# Altium PCB Xenon.PcbDoc
Units mm, origin at the board's own origin, x right, y up, seen from the top; angles counter-clockwise.
Board outline 40 x 40 mm, 2 copper layers (Top Layer, Bottom Layer); 37 components, 52 nets, 189 pads, 93 vias.
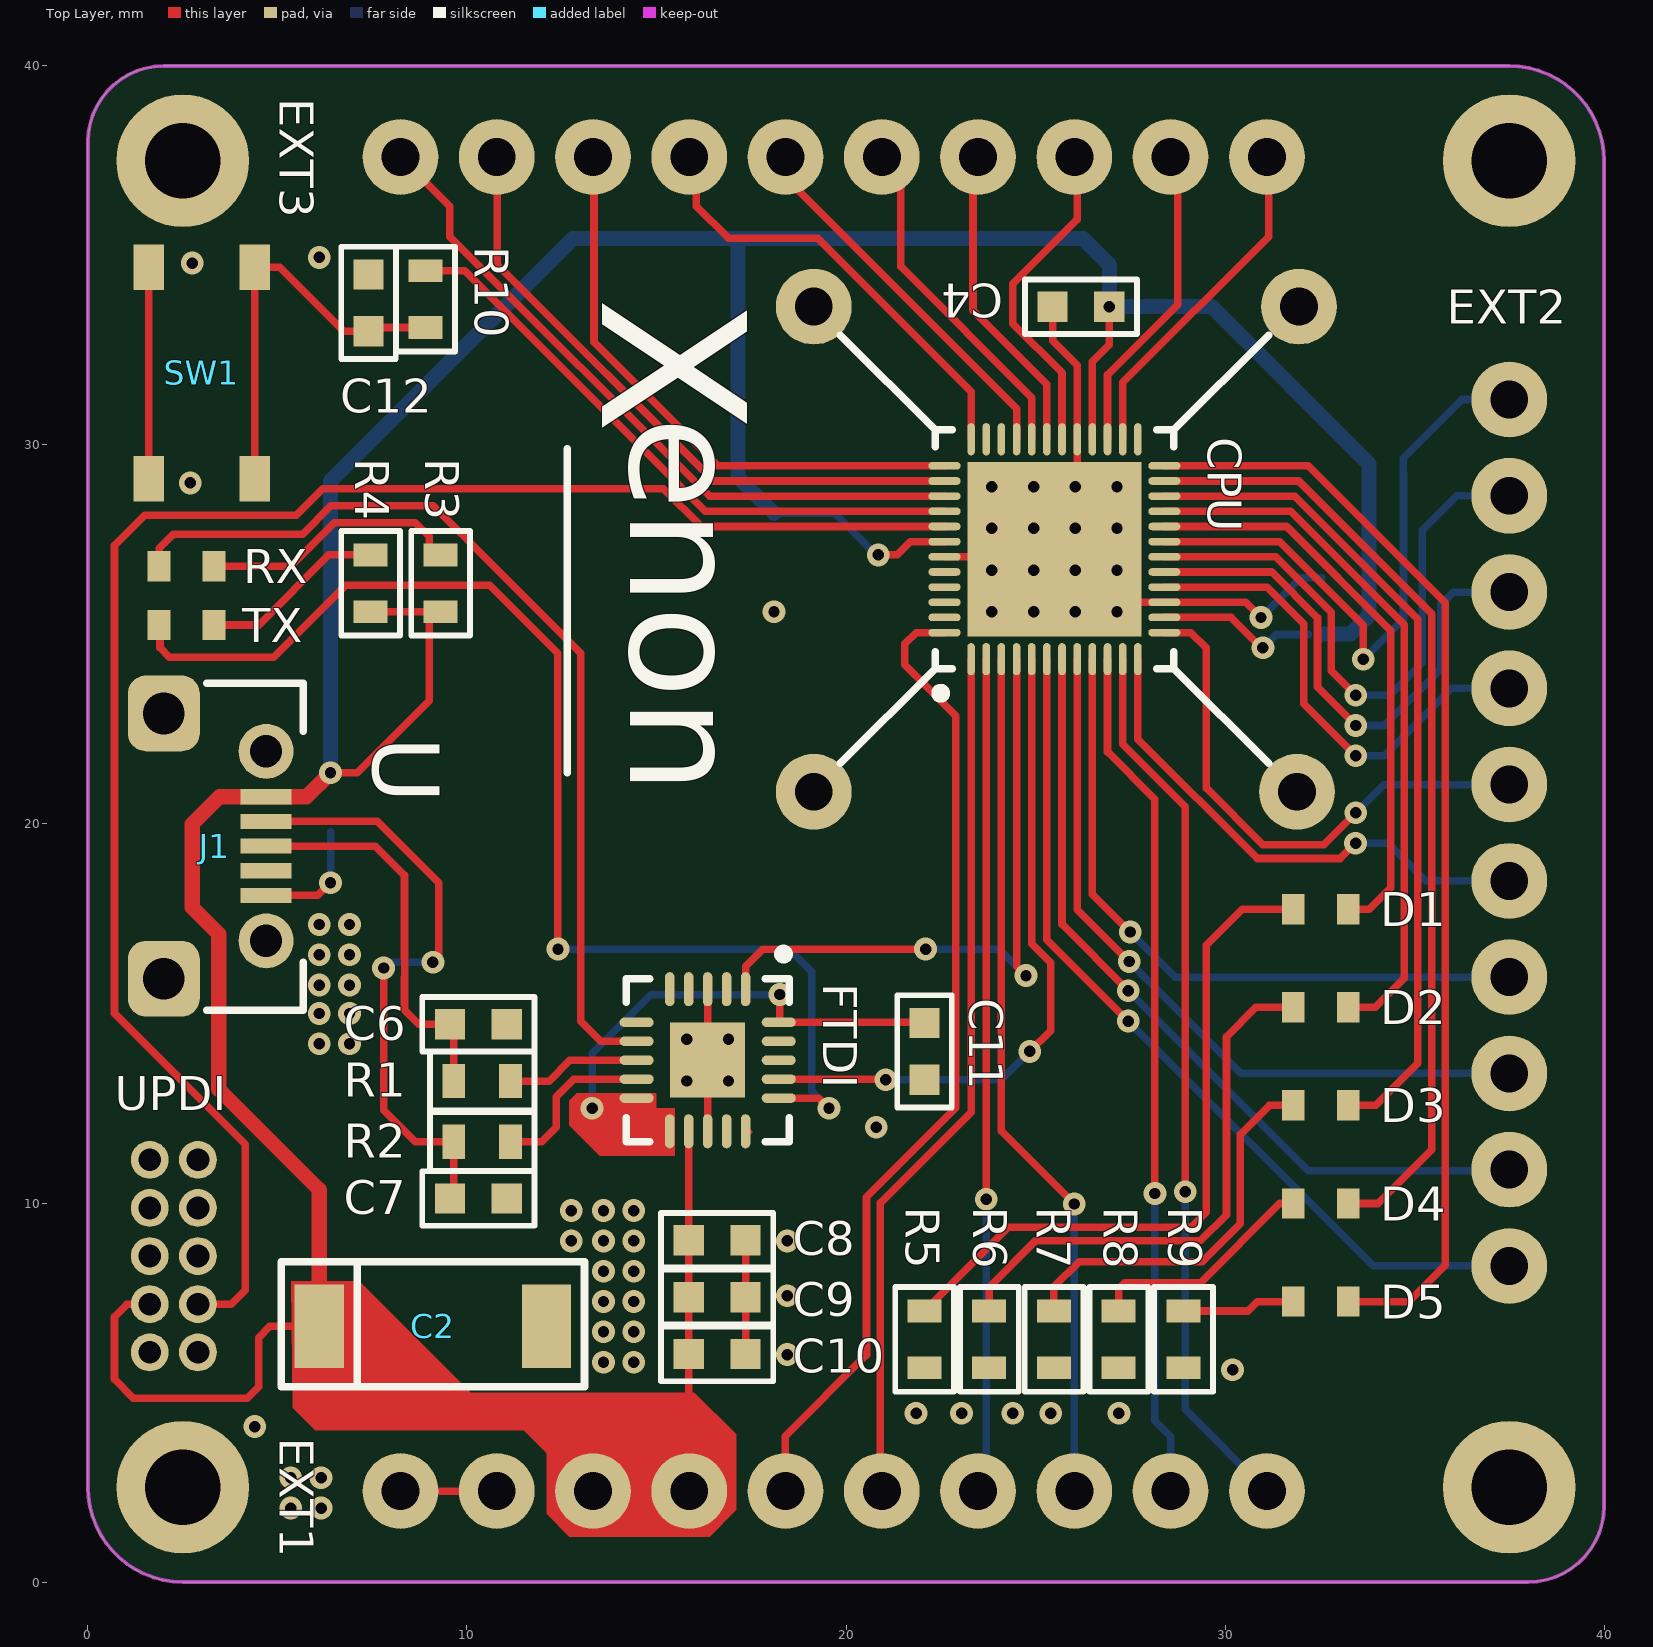
[diagram p0: Top Layer view]
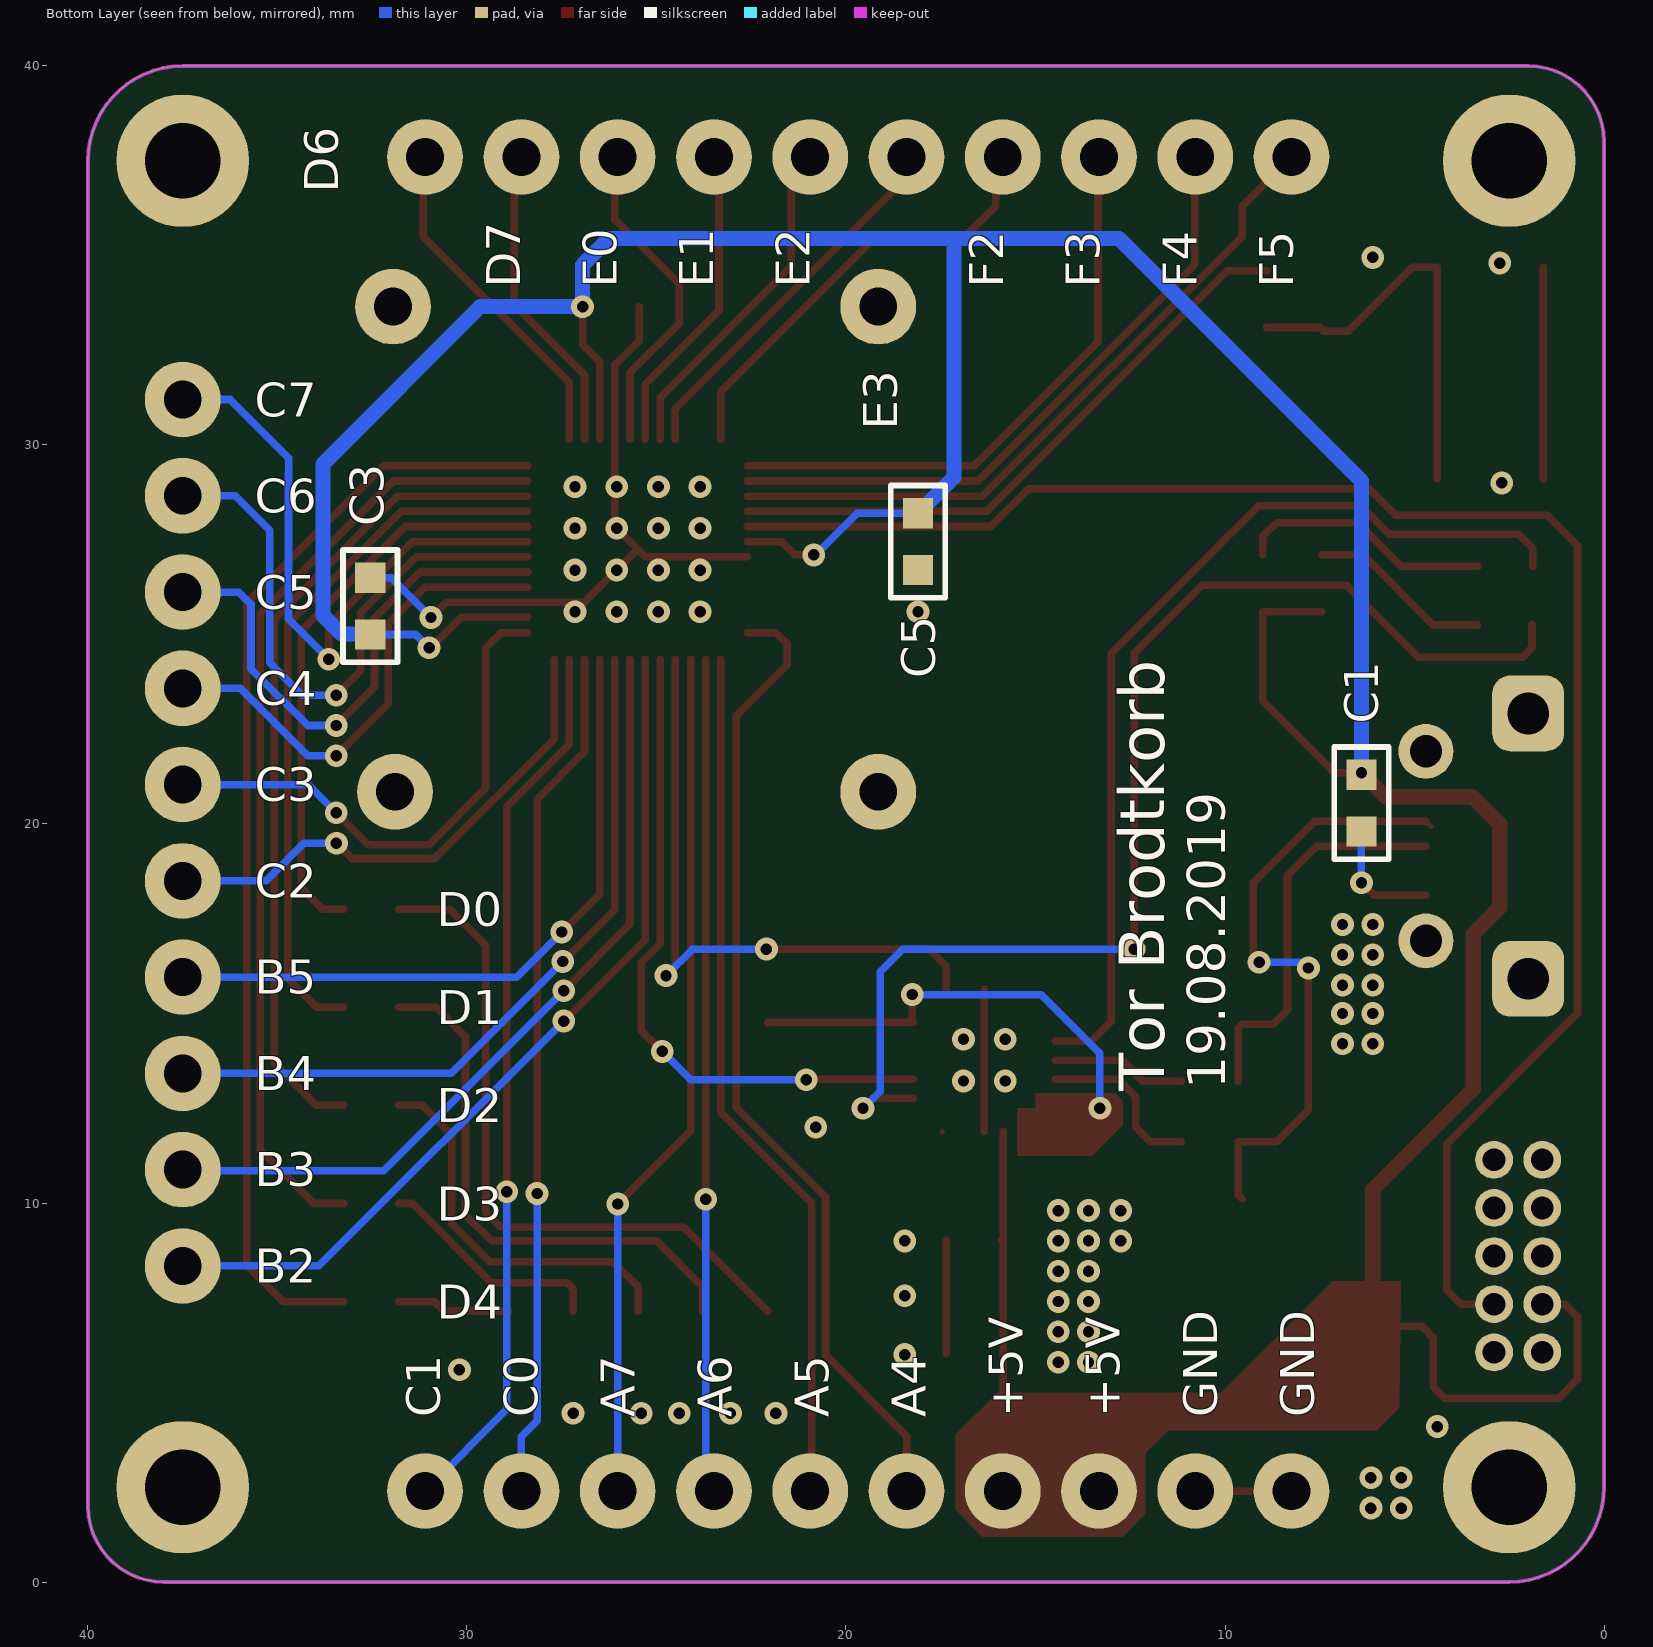
[diagram p1: Bottom Layer view, seen from below]
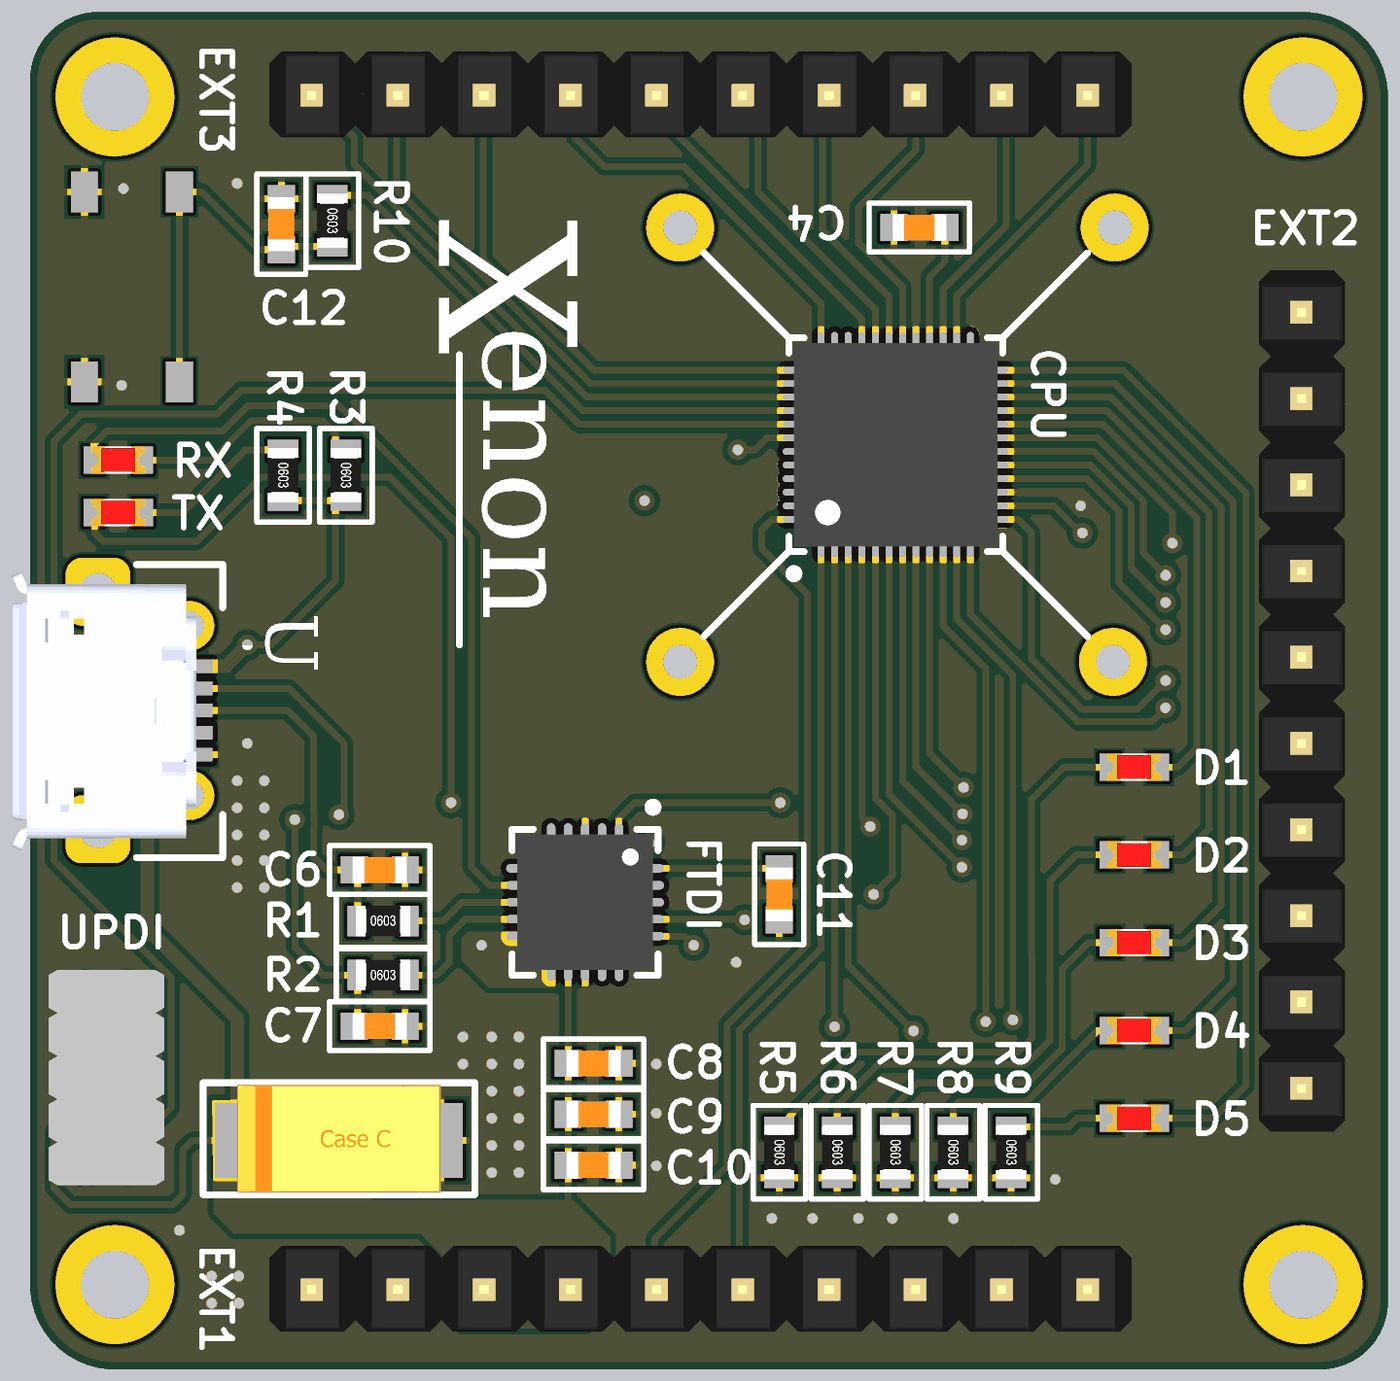
[diagram p2: 3D render of the assembled board from above, using the file's embedded part models]
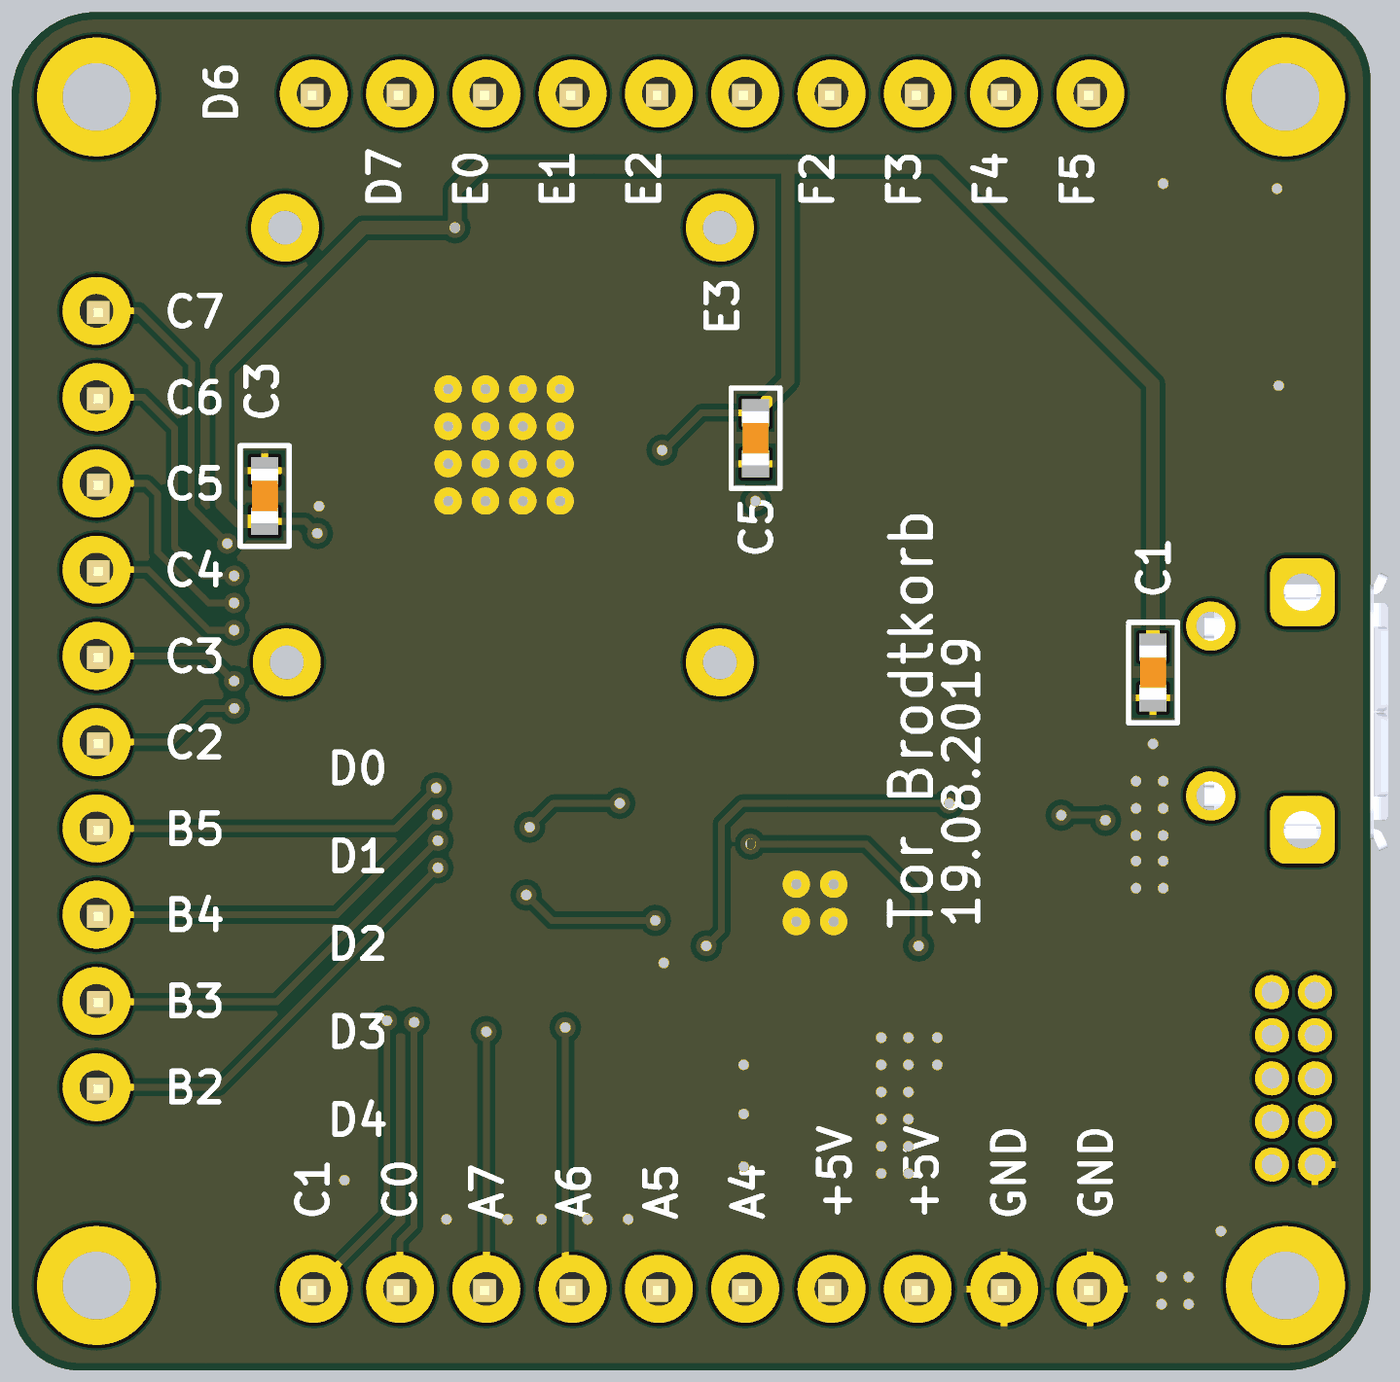
[diagram p3: 3D render of the assembled board from below, using the file's embedded part models]

## Layer stack, top to bottom
Top Solder: solder mask 0.0102, Solder Resist, Dk 3.5
Top Layer: signal copper 0.0356
Dielectric 1: dielectric 0.32, FR-4, Dk 4.8
Bottom Layer: signal copper 0.0356
Bottom Solder: solder mask 0.0102, Solder Resist, Dk 3.5

## Board outline
2.5,0 cw(c2.5,2.5) 0,2.5 0,38 cw(c2,38) 2,40 37.5,40 cw(c37.5,37.5) 40,37.5 40,2 cw(c38,2) 38,0

## Design rules (kind name [scope] priority, off if disabled: settings)
Clearance [All] p1: gap=0.16 ignorepadtopadclearanceinfootprint=FALSE except(0: Arc-Text Arc-Hole Track-Text Track-Hole SMDPad-Text SMDPad-Hole THPad-Text THPad-Hole Via-Text Via-Hole Fill-Text Fill-Hole Poly-Text Poly-Hole Region-Text Region-Hole Text-Text Text-Hole)
Height [All] p1: minheight=0 maxheight=200 prefheight=12.7
HoleSize [All] p1: absolutevalues=TRUE maxlimit=6.35 minlimit=0.3 maxpercent=80.000 minpercent=20.000
MinimumSolderMaskSliver [All] p1: minsoldermaskwidth=0.1
PlaneClearance [All] p1: clearance=1
PlaneConnect [All] p1: planeconnectstyle=Relief reliefexpansion=0.508 reliefentries=4 reliefconductorwidth=1 reliefairgap=0.254
PolygonConnect PolygonConnect_1 [IsVia] p1: connectstyle=Direct reliefconductorwidth=0.254 reliefentries=4 polygonreliefangle="90 Angle" airgapwidth=0.254
PolygonConnect [All] p2: connectstyle=Relief reliefconductorwidth=0.2 reliefentries=4 polygonreliefangle="90 Angle" airgapwidth=0.2
RoutingVias [All] p1: holewidth=0.3 width=0.6 viastyle="Through Hole" minholewidth=0.3 minwidth=0.6 maxholewidth=6.35 maxwidth=10
SilkToSolderMaskClearance [IsPad] p1: minsilkscreentomaskgap=0.178 clearancetoexposedcopper=TRUE
SolderMaskExpansion [All] p1: expansion=0.102
Width "Width power" [InNet('+5V')] p1: maxlimit=0.5 minlimit=0.127 preferedwidth=0.4 minimp=50.000000 maximp=50.000000 favimp=50.000000
Width [All] p2: maxlimit=0.5 minlimit=0.127 preferedwidth=0.2 minimp=50.000000 maximp=50.000000 favimp=50.000000
24 further rules are at their usual default settings.

## Classes and differential pairs
component class Xenon: C2 C4 C5 C6 C7 C8 C9 C10 C11 C12 CPU D1 D2 D3 D4 D5 EXT1 EXT2 EXT3 FTDI J1 R1 R2 R3 R4 R5 R6 R7 R8 R9 R10 RX SW1 TX UPDI

## Components (designator, comment, footprint, x,y, rotation, side; value= is the part's Value field where it differs from the comment)
C1 "02016D104KAT2A" C0603 6.4,20.55 r90 bottom value=4.7uF
C2 "293D106X9020C2TE3" 293D106X9020C2TE3 6.1,6.75 r0 top value=10uF
C3 "02016D104KAT2A" C0603 32.55,25.75 r270 bottom value=100nF
C4 "02016D104KAT2A" C0603 26.2,33.65 r0 top value=100nF
C5 "02016D104KAT2A" C0603 18.1,27.45 r90 bottom value=100nF
C6 "02016D104KAT2A" C0603 10.3,14.717 r180 top value=47pF
C7 "02016D104KAT2A" C0603 10.3,10.117 r180 top value=47pF
C8 "02016D104KAT2A" C0603 16.6,9.017 r180 top value=10nF
C9 "02016D104KAT2A" C0603 16.6,7.517 r180 top value=100nF
C10 "02016D104KAT2A" C0603 16.6,6.017 r180 top value=4.7pF
C11 "02016D104KAT2A" C0603 22.07,14 r90 top value=100nF
C12 "02016D104KAT2A" C0603 7.4,33.75 r270 top value=100nF
CPU "ATmega4809" ATMEGA4809-MFR 25.5,27.25 r90 top (schematic designator U2)
D1 "LED Red" "L0603 RED" 32.525,17.75 r180 top
D2 "LED Red" "L0603 RED" 32.525,15.163 r180 top
D3 "LED Red" "L0603 RED" 32.525,12.575 r180 top
D4 "LED Red" "L0603 RED" 32.525,9.988 r180 top
D5 "LED Red" "L0603 RED" 32.525,7.4 r180 top
EXT1 "Header" "Header 1x10 2.54mm" 8.245,2.4 r270 top
EXT2 "Header" "Header 1x10 2.54mm" 37.5,31.2 r180 top (schematic designator J1)
EXT3 "Header" "Header 1x10 2.54mm" 8.245,37.6 r270 top
FTDI "FTDI" FT231XQ-R 16.35,13.767 r270 top (schematic designator U1)
J1 "USB micro" "USB micro" 2.5,19.4 r270 top
R1 "CPF-A-0603B100KE1" R0603 10.4,13.217 r0 top value=27R
R2 "CPF-A-0603B100KE1" R0603 10.4,11.617 r0 top value=27R
R3 "CPF-A-0603B100KE1" R0603 9.3,26.35 r270 top value=270R
R4 "CPF-A-0603B100KE1" R0603 7.45,26.35 r270 top value=270R
R5 "CPF-A-0603B100KE1" R0603 22.07,6.4 r270 top value=330R
R6 "CPF-A-0603B100KE1" R0603 23.778,6.4 r270 top value=330R
R7 "CPF-A-0603B100KE1" R0603 25.485,6.4 r270 top value=330R
R8 "CPF-A-0603B100KE1" R0603 27.193,6.4 r270 top value=330R
R9 "CPF-A-0603B100KE1" R0603 28.9,6.4 r270 top value=330R
R10 "CPF-A-0603B100KE1" R0603 8.9,33.85 r270 top value=100R
RX "LED Red" "L0603 RED" 2.6,26.8 r180 top (schematic designator RX1)
SW1 "KSC222G LFS" "KSC222G LFS" 3,31.9 r180 top
TX "LED Red" "L0603 RED" 2.6,25.25 r180 top (schematic designator TX1)
UPDI "Header 2x3" "HEADER 2X5 1.27MM" 2.9,11.14 r180 top (schematic designator J2)

## Footprints (in the part's own frame and the unit in brackets; to place one, negate y for a bottom-side part, rotate by r counter-clockwise, add the part's x,y. Pads: shape width x height; smd on the part's side, far side on the other; paste and mask are expansions set on the pad)
293D106X9020C2TE3 [mm] "Tant. CapasitorSMD 10uF"
  rect 1.3x2.2 smd paste+0: 1(0,0) 2(6,0)
  silkscreen extent -1,-1.6 7,1.7, body extent 0,-1.55 6,1.65, height 2.5
ATMEGA4809-MFR [mm] "QFN, 48-Leads, Body 6.00x6.00mm, Pitch 0.40mm, Thermal Pad 4.60x4.60mm, IPC Medium Density"
  oval 0.85x0.2 smd mask+0.172: 1(-2.9,2.2) 2(-2.9,1.8) 3(-2.9,1.4) 4(-2.9,1) 5(-2.9,0.6) 6(-2.9,0.2) 7(-2.9,-0.2) 8(-2.9,-0.6) 9(-2.9,-1) 10(-2.9,-1.4) 11(-2.9,-1.8) 12(-2.9,-2.2) 25(2.9,-2.2) 26(2.9,-1.8) 27(2.9,-1.4) 28(2.9,-1) 29(2.9,-0.6) 30(2.9,-0.2) 31(2.9,0.2) 32(2.9,0.6) 33(2.9,1) 34(2.9,1.4) 35(2.9,1.8) 36(2.9,2.2)
  oval 0.2x0.85 smd mask+0.172: 13(-2.2,-2.9) 14(-1.8,-2.9) 15(-1.4,-2.9) 16(-1,-2.9) 17(-0.6,-2.9) 18(-0.2,-2.9) 19(0.2,-2.9) 20(0.6,-2.9) 21(1,-2.9) 22(1.4,-2.9) 23(1.8,-2.9) 24(2.2,-2.9) 37(2.2,2.9) 38(1.8,2.9) 39(1.4,2.9) 40(1,2.9) 41(0.6,2.9) 42(0.2,2.9) 43(-0.2,2.9) 44(-0.6,2.9) 45(-1,2.9) 46(-1.4,2.9) 47(-1.8,2.9) 48(-2.2,2.9)
  rect 4.6x4.6 smd: 49(0,0)
  silkscreen extent -3.92,-3.15 3.15,3.15, body extent -3,-3 3,3, height 0.55
C0603 [mm]
  rect 0.8x0.8 smd: 1(-0.75,0) 2(0.75,0)
  silkscreen extent -1.48,-0.72 1.48,0.72, body extent -0.8,-0.4 0.8,0.4, height 0.8
FT231XQ-R [mm] "QFN, 20-Leads, Body 4.00x4.00mm, Pitch 0.50mm, Thermal Pad 1.98x1.98mm, IPC Medium Density"
  oval 0.9x0.25 smd mask+0.162: 1(-1.875,1) 2(-1.875,0.5) 3(-1.875,0) 4(-1.875,-0.5) 5(-1.875,-1) 11(1.875,-1) 12(1.875,-0.5) 13(1.875,0) 14(1.875,0.5) 15(1.875,1)
  oval 0.25x0.9 smd mask+0.162: 6(-1,-1.875) 7(-0.5,-1.875) 8(0,-1.875) 9(0.5,-1.875) 10(1,-1.875) 16(1,1.875) 17(0.5,1.875) 18(0,1.875) 19(-0.5,1.875) 20(-1,1.875)
  rect 1.98x1.98 smd: 21(0,0)
  silkscreen extent -2.92,-2.15 2.15,2.15, body extent -2,-2 2,2, height 0.8
"Header 1x10 2.54mm" [mm]
  round 2 hole 1: 1(0,0) 2(0,2.54) 3(0,5.08) 4(0,7.62) 5(0,10.16) 6(0,12.7) 7(0,15.24) 8(0,17.78) 9(0,20.32) 10(0,22.86)
  body extent -1.24,-1.2 1.3,24.2, height 9.2
"HEADER 2X5 1.27MM" [mm]
  round 1 hole 0.6: 1(0,0) 2(1.27,0) 3(0,1.27) 4(1.27,1.27) 5(0,2.54) 6(1.27,2.54) 7(0,3.81) 8(1.27,3.81) 9(0,5.08) 10(1.27,5.08)
  body extent -1.05,-0.64 2.35,5.72, height 5.5
"KSC222G LFS" [mm]
  rect 0.8x1.2 smd: 1(-1.4,2.794) 2(-1.4,-2.794) 3(1.4,2.794) 4(1.4,-2.794)
  body extent -2.29,-3.06 2.29,3.05, height 1.5
"L0603 RED" [mm]
  rect 0.6x0.8 smd: 1(-0.725,0) 2(0.725,0)
  body extent -0.8,-0.4 0.8,0.4, height 0.6
R0603 [mm]
  rect 0.6x0.9 smd: 1(-0.75,0) 2(0.75,0)
  silkscreen extent -1.38,-0.77 1.38,0.78, body extent -0.8,-0.45 0.8,0.45, height 0.5
"USB micro" [mm]
  rrect50% 2x1.9 hole 1.1 unplated: 0(-3.517,-0.5) 0(3.483,-0.5)
  round 1.45 hole 0.85 unplated: 0(-2.517,2.2) 0(2.483,2.2)
  rect 0.4x1.35 smd mask+0.152: 1(-1.317,2.2) 2(-0.667,2.2) 3(-0.017,2.2) 4(0.633,2.2) 5(1.283,2.2)
  silkscreen extent -4.32,0.63 4.32,3.18, body extent -4.1,-3.03 4.1,2.4, height 0.23

## Part data
C1 C3 C4 C5 C6 C7 C8 C9 C10 C11 C12: "C0603"
C2: "Tant. CapasitorSMD 10uF"
CPU: library part ATMEGA4809-MFR, "ATmega4809 48-pin UQFN"
D1 D2 D3 D4 D5 RX TX: library part HSMG-C190, "LED 0603 Red", Color=Red
EXT1 EXT2 EXT3: library part 2210S-10SG-85, "Header 1x10 2.54mm male"
FTDI: library part FT231XQ-R, "UART to USB converter"
J1: library part 47590-0001
R1 R2 R3 R4 R5 R6 R7 R8 R9 R10: "R0603"
SW1: "Button SMD"
UPDI: library part 20021111-00010T4LF, "Header  2x5 1.27mm male"

## Free pads (board coordinates)
  round 3.5 hole 2: ""(2.5,2.5) ""(2.5,37.5) ""(37.5,2.5) ""(37.5,37.5)
  round 2 hole 1: ""(19.15,20.85) ""(19.15,33.65) ""(31.9,20.85) ""(31.95,33.65)

## Via types
v1: diameter 0.6, hole 0.3, Top Layer to Bottom Layer, tented both sides, 73 vias
v2: diameter 0.6, hole 0.3, Top Layer to Bottom Layer, 20 vias

## Nets (pads, with @x,y where several pads share a name; then routed paths per layer and width w, separated by ;. In a path a pad name is that pad's centre, name@x,y a point inside that pad or via, vN(x,y) a via of type N, cw(c..) or ccw(c..) an arc to the next point about the centre after c; other vN are vias at no path point)
+5V: C1.2 C2.1 C3.2 C4.2 C5.2 C8.2 C9.2 C10.2 CPU.14 CPU.28 CPU.42 EXT1.3 EXT1.4 FTDI.12 J1.1 R3.2 R4.2 UPDI.8 | length 126.3
  Top Layer w0.2: UPDI.8 1.03,7.33 0.7,7 0.7,5.35 1.2,4.85 4.2,4.85 4.5,5.15 4.5,6.45 4.8,6.75 C2.1 6.1,4.75 6.55,4.3 12.95,4.3 13.325,3.925 EXT1.3 EXT1.4 15.85,2.415 C10.2 C9.2 C8.2 ; v1(6.4,21.35) 7.1,21.35 9,23.25 9,25.6 R4.2 ; FTDI.12 15.85,9.067 C8.2@15.9,9.017 ; v1(20.85,27.1) 21.35,27.1 21.7,27.45 CPU.42 ; CPU.28 26.5,32.2 26.95,32.65 v1(26.95,33.65) ; CPU.14 30.158,25.45 30.958,24.65 v1(31,24.65)
  Top Layer w0.4: C2.1 6.1,10.35 3.45,13 3.45,17.1 2.75,17.8 2.75,20 3.467,20.717 J1.1 5.767,20.717 v1(6.4,21.35)
  Bottom Layer w0.2: C5.2 19.7,28.2 20.8,27.1 v1(20.85,27.1) ; v1(31,24.65) 31.35,25 C3.2@32.2,25
  Bottom Layer w0.4: C1.2@6.45,21.3 v1(6.4,21.35) 6.4,29.05 12.8,35.45 17.15,35.45 ; C5.2 17.15,29.15 17.15,35.45 ; C3.2 32.56,25.01 33.31,25.01 33.8,25.5 33.8,29.5 29.65,33.65 v1(26.95,33.65) 26.95,34.75 26.25,35.45 17.15,35.45
A1: CPU.39 EXT3.1 | length 18.5
  Top Layer w0.2: EXT3.1 9.55,36.295 9.55,35.5 16.4,28.65 CPU.39
A2: CPU.38 EXT3.2 | length 17.2
  Top Layer w0.2: EXT3.2@11.28,37.6 10.8,37.12 10.8,34.759 16.509,29.05 CPU.38
A3: CPU.37 EXT3.3 | length 15.7
  Top Layer w0.2: EXT3.3@13.82,37.6 13.35,37.13 13.35,32.718 16.618,29.45 CPU.37
A4: CPU.36 EXT3.4 | length 11.9
  Top Layer w0.2: EXT3.4 16.05,37.415 16.05,36.3 16.9,35.45 19.25,35.45 23.3,31.4 CPU.36
A5: CPU.33 EXT3.5 | length 10
  Top Layer w0.2: EXT3.5 18.405,37.045 24.5,30.95 CPU.33
A6: CPU.32 EXT3.6 | length 8.9
  Top Layer w0.2: EXT3.6@21.44,37.6 21.44,34.71 24.9,31.25 CPU.32
A7: CPU.31 EXT3.7 | length 8.5
  Top Layer w0.2: EXT3.7@23.98,37.6 23.35,36.97 23.35,33.55 25.3,31.6 CPU.31
A8: CPU.30 EXT3.8 | length 8.9
  Top Layer w0.2: CPU.30 25.7,31.9 24.4,33.2 24.4,34.25 26.1,35.95 26.1,37.18 EXT3.8@26.52,37.6
A9: CPU.27 EXT3.9 | length 8.3
  Top Layer w0.2: CPU.27 26.9,31.85 28.75,33.7 28.75,37.29 EXT3.9@29.06,37.6
A10: CPU.26 EXT3.10 | length 9.2
  Top Layer w0.2: CPU.26 27.3,31.65 31.15,35.5 31.15,37.15 EXT3.10@31.6,37.6
CS: CPU.3 EXT1.8 | length 22.7
  Top Layer w0.2: CPU.3 24.1,11.9 v1(26.025,9.975)
  Bottom Layer w0.2: EXT1.8 v1(26.025,9.975)
D1: CPU.19 EXT2.1 | length 16.2
  Top Layer w0.2: CPU.19 31.445,27.45 33.45,25.445 33.65,25.245 v1(33.65,24.35)
  Bottom Layer w0.2: v1(33.65,24.35) 34.71,25.41 34.71,29.241 34.7,29.251 34.7,29.65 36.25,31.2 EXT2.1
D2: CPU.18 EXT2.2 | length 15.7
  Top Layer w0.2: CPU.18 31.336,27.05 32.8,25.586 32.8,24.05 v1(33.45,23.4)
  Bottom Layer w0.2: v1(33.45,23.4) 34.35,23.4 35.2,24.25 35.2,27.75 36.11,28.66 EXT2.2
D3: CPU.17 EXT2.3 | length 14.3
  Top Layer w0.2: CPU.17 31.227,26.65 32.44,25.437 32.44,23.618 33.45,22.608 v1(33.45,22.6)
  Bottom Layer w0.2: v1(33.45,22.6) 34.2,22.6 35.7,24.1 35.7,25.8 36.02,26.12 EXT2.3
D4: CPU.16 EXT2.4 | length 12.9
  Top Layer w0.2: CPU.16 31.118,26.25 32.08,25.288 32.08,23.17 v1(33.45,21.8)
  Bottom Layer w0.2: v1(33.45,21.8) 34.2,21.8 35.98,23.58 EXT2.4
D5: CPU.13 EXT2.5 | length 14.2
  Top Layer w0.2: CPU.13 29.1,25.05 29.5,24.65 29.5,20.95 31,19.45 32.6,19.45 v1(33.45,20.3)
  Bottom Layer w0.2: v1(33.45,20.3) 34.19,21.04 EXT2.5
D6: CPU.12 EXT2.6 | length 13.8
  Top Layer w0.2: CPU.12 27.7,22.241 30.851,19.09 33.04,19.09 v1(33.445,19.495)
  Bottom Layer w0.2: v1(33.445,19.495) 34.305,19.495 35.3,18.5 EXT2.6
D7: CPU.9 EXT2.7 | length 18.1
  Top Layer w0.2: CPU.9 26.5,18.15 v1(27.5,17.15)
  Bottom Layer w0.2: v1(27.5,17.15) 28.69,15.96 EXT2.7
D8: CPU.8 EXT2.8 | length 19.8
  Top Layer w0.2: CPU.8 26.1,17.742 v1(27.471,16.371)
  Bottom Layer w0.2: v1(27.471,16.371) 30.422,13.42 EXT2.8
D9: CPU.7 EXT2.9 | length 21.5
  Top Layer w0.2: CPU.7 25.7,17.35 v1(27.45,15.6)
  Bottom Layer w0.2: v1(27.45,15.6) 32.2,10.85 37.47,10.85 EXT2.9
D10: CPU.6 EXT2.10 | length 23.2
  Top Layer w0.2: CPU.6 25.3,16.95 v1(27.45,14.8)
  Bottom Layer w0.2: v1(27.45,14.8) 33.91,8.34 EXT2.10
EXT_RXD: CPU.11 EXT1.10 | length 23.5
  Top Layer w0.2: CPU.11 27.3,22.1 28.95,20.45 v1(28.95,10.3)
  Bottom Layer w0.2: v1(28.95,10.3) 28.95,4.555 EXT1.10
EXT_TXD: CPU.10 EXT1.9 | length 22.6
  Top Layer w0.2: CPU.10 26.9,21.9 28.15,20.65 v1(28.15,10.25)
  Bottom Layer w0.2: v1(28.15,10.25) 28.15,4.25 28.565,3.835 EXT1.9
GND: C1.1 C2.2 C3.1 C4.1 C5.1 C6.1 C7.1 C8.1 C9.1 C10.1 C11.1 C12.1 CPU.15 CPU.29 CPU.43 CPU.49 EXT1.1 EXT1.2 FTDI.3 FTDI.13 FTDI.21 J1.5 R5.2 R6.2 R7.2 R8.2 R9.2 SW1.3 SW1.4 UPDI.10 | length 36.2
  Top Layer w0.2: SW1.3 SW1.4 ; J1.5 6.067,18.117 v1(6.4,18.45) ; EXT1.1 EXT1.2 ; FTDI.13 FTDI.21 FTDI.3 ; C10.1 C9.1 C8.1 ; CPU.43 25.3,27.05 CPU.49 ; C4.1 25.45,32.75 26.1,32.1 CPU.29 26.1,27.85 v2(26.05,27.8) CPU.49 ; v1(30.95,25.45) 30.55,25.85 CPU.15 26.9,25.85 CPU.49
  Bottom Layer w0.2: v1(6.4,18.45) C1.1 ; v1(30.95,25.45) 32,26.5 C3.1
  other v1: 5.35,1.95 6.15,1.95 5.35,2.75 6.15,2.75 4.4,4.1 21.85,4.45 23.05,4.45 24.4,4.45 25.4,4.45 27.2,4.45 30.2,5.6 13.6,5.8 14.4,5.8 18.45,6 13.6,6.6 14.4,6.6 13.6,7.4 14.4,7.4 18.45,7.55 13.6,8.2 14.4,8.2 12.75,9 13.6,9 14.4,9 18.45,9 12.75,9.8 13.6,9.8 14.4,9.8 20.8,12 6.1,14.2 6.9,14.2 6.1,15 6.9,15 6.1,15.75 6.9,15.75 6.1,16.55 6.9,16.55 6.1,17.35 6.9,17.35 2.7,29 2.75,34.8 6.1,34.95
  other v2: 15.8,13.217 16.9,13.217 15.8,14.317 16.9,14.317 23.85,25.6 24.95,25.6 26.05,25.6 27.15,25.6 23.85,26.7 24.95,26.7 26.05,26.7 27.15,26.7 23.85,27.8 24.95,27.8 27.15,27.8 23.85,28.9 24.95,28.9 26.05,28.9 27.15,28.9
LED_1: CPU.20 D1.1 | length 15.2
  Top Layer w0.2: CPU.20 31.623,27.85 34.37,25.103 34.37,18.32 33.8,17.75 D1.1
LED_2: CPU.21 D2.1 | length 18.7
  Top Layer w0.2: CPU.21 31.732,28.25 34.73,25.252 34.73,15.93 33.963,15.163 D2.1
LED_3: CPU.22 D3.1 | length 22
  Top Layer w0.2: CPU.22 31.841,28.65 35.09,25.401 35.09,13.69 33.975,12.575 D3.1
LED_4: CPU.23 D4.1 | length 25.4
  Top Layer w0.2: CPU.23 31.95,29.05 35.45,25.55 35.45,11.4 34.038,9.988 D4.1
LED_5: CPU.24 D5.1 | length 29.3
  Top Layer w0.2: CPU.24 32.2,29.45 35.81,25.84 35.81,8.36 34.85,7.4 D5.1
MISO: CPU.1 EXT1.6 | length 23
  Top Layer w0.2: EXT1.6 20.9,2.445 20.9,10 23.3,12.4 CPU.1
  Bottom Layer w0.2: EXT1.6@20.9,2.445 EXT1.6
MOSI: CPU.48 EXT1.5 | length 25.9
  Top Layer w0.2: EXT1.5 18.4,2.405 18.4,3.85 20.54,5.99 20.54,10.149 22.9,12.509 22.9,22.85 21.55,24.2 21.55,24.75 21.85,25.05 CPU.48
NetC6_2: C6.2 J1.3 R1.1 | length 10.4
  Top Layer w0.2: J1.3 7.583,19.417 8.35,18.65 8.35,16.442 8.36,16.432 8.36,15.968 8.35,15.958 8.35,15.1 8.733,14.717 C6.2 9.65,14.617 R1.1
NetC7_2: C7.2 J1.2 R2.1 | length 16.4
  Top Layer w0.127: J1.2@4.564,19.931 J1.2
  Top Layer w0.2: J1.2 7.633,20.067 9.25,18.45 9.25,16.5 v1(9.1,16.35) ; v1(7.8,16.2) 7.8,12.45 8.633,11.617 R2.1 9.65,10.217 C7.2
  Bottom Layer w0.2: v1(7.8,16.2) 7.95,16.35 v1(9.1,16.35)
NetC11_2: C11.2 FTDI.10 FTDI.11 FTDI.20 | length 13.5
  Top Layer w0.2: 13.3,11.9 v1(13.3,12.5) 13.567,12.767 FTDI.10 ; FTDI.11@15.34,11.883 FTDI.11 ; v1(18.25,15.5) 18.25,14.792 FTDI.20 22.053,14.767 C11.2
  Bottom Layer w0.2: v1(13.3,12.5) 13.3,13.95 14.85,15.5 v1(18.25,15.5)
NetC12_2: C12.2 R10.2 SW1.1 SW1.2 | length 10.8
  Top Layer w0.2: SW1.1 SW1.2 5.056,34.694 6.75,33 C12.2 7.5,33.1 R10.2
NetD1_2: D1.2 R5.1 | length 18.3
  Top Layer w0.2: R5.1 24.28,9.36 29.11,9.36 29.51,9.76 29.51,12.19 29.5,12.2 29.5,16.8 30.45,17.75 D1.2
NetD2_2: D2.2 R6.1 | length 14.5
  Top Layer w0.2: R6.1 23.778,7.778 25,9 29.35,9 30.04,9.69 30.04,14.39 30.813,15.163 D2.2
NetD3_2: D3.2 R7.1 | length 10.3
  Top Layer w0.2: R7.1 25.485,7.785 26.15,8.45 29.4,8.45 30.4,9.45 30.4,11.8 31.175,12.575 D3.2
NetD4_2: D4.2 R8.1 | length 6.1
  Top Layer w0.2: R8.1 27.193,7.742 27.35,7.9 29.359,7.9 31.447,9.988 D4.2
NetD5_2: D5.2 R9.1 | length 3
  Top Layer w0.2: R9.1 30.6,7.15 30.85,7.4 D5.2
NetR1_2: FTDI.8 R1.2 | length 3.6
  Top Layer w0.2: R1.2 12.167,13.217 12.717,13.767 FTDI.8
NetR2_2: FTDI.9 R2.2 | length 4.5
  Top Layer w0.2: R2.2 11.967,11.617 12.35,12 12.35,12.8 12.817,13.267 FTDI.9
NetR3_1: R3.1 RX.1 | length 6.8
  Top Layer w0.2: RX.1 5.35,26.8 6.5,27.95 8.64,27.95 9,27.59 R3.1@9,27.1
NetR4_1: R4.1 TX.1 | length 4.9
  Top Layer w0.2: TX.1@3.35,25.25 4.5,25.25 6.35,27.1 R4.1
NetR10_1: CPU.40 R10.1 | length 16.3
  Top Layer w0.2: R10.1 9.941,34.6 16.291,28.25 CPU.40
NetRX1_2: FTDI.7 RX.2 | length 25.1
  Top Layer w0.2: RX.2 1.875,27.275 2.25,27.65 5.66,27.65 6.41,28.4 9.11,28.4 9.85,27.66 9.858,27.66 10.01,27.508 10.01,27.5 13,24.51 13,14.8 13.533,14.267 FTDI.7
NetTX1_2: FTDI.16 TX.2 | length 32.7
  Top Layer w0.2: TX.2@1.9,25.25 1.9,24.65 2.15,24.4 4.9,24.4 6.8,26.3 10.6,26.3 12.4,24.5 v1(12.4,16.7) ; FTDI.16 19.283,12.767 v1(19.55,12.5)
  Bottom Layer w0.2: v1(12.4,16.7) 18.5,16.7 19.1,16.1 19.1,12.95 v1(19.55,12.5)
SCK: CPU.2 EXT1.7 | length 22
  Top Layer w0.2: v1(23.7,10.1) CPU.2
  Bottom Layer w0.2: EXT1.7 23.7,2.615 v1(23.7,10.1)
UPDI: CPU.41 UPDI.7 | length 45.4
  Top Layer w0.2: UPDI.7 3.78,7.33 4.15,7.7 4.15,11.55 0.7,15 0.7,27.35 1.5,28.15 5.5,28.15 6.2,28.85 15.182,28.85 16.182,27.85 CPU.41
USB_RXD: CPU.5 FTDI.17 | length 17.7
  Top Layer w0.2: FTDI.17 21.033,13.267 v1(21.05,13.25) ; v1(24.85,14) 25.4,14.55 25.4,16.341 24.9,16.841 CPU.5
  Bottom Layer w0.2: v1(21.05,13.25) 24.1,13.25 v1(24.85,14)
USB_TXD: CPU.4 FTDI.1 | length 16.9
  Top Layer w0.2: FTDI.1 17.35,16.25 17.8,16.7 v1(22.1,16.7) ; CPU.4 24.5,16.25 v1(24.75,16)
  Bottom Layer w0.2: v1(22.1,16.7) 24.05,16.7 v1(24.75,16)
pads on no net: CPU.25 CPU.34 CPU.35 CPU.44 CPU.45 CPU.46 CPU.47 FTDI.2 FTDI.4 FTDI.5 FTDI.6 FTDI.14 FTDI.15 FTDI.18 FTDI.19 J1.0 J1.4 UPDI.1 UPDI.2 UPDI.3 UPDI.4 UPDI.5 UPDI.6 UPDI.9
copper on no net: | length 0
  Top Layer w0.127: 17.45,11.892 17.465,11.877
  other v1: 18.1,25.6

## Polygon pours and split planes (outlines as drawn)
GND on Bottom Layer "BOTTOM GND" (solid, shelved, pour order 3): 2.5,0 cw(c2.5,2.5) 0,2.5 0,38 cw(c2,38) 2,40 37.5,40 cw(c37.5,37.5) 40,37.5 40,2 cw(c38,2) 38,0
GND on Top Layer "TOP GND" (solid, shelved, pour order 2): 2.5,0 cw(c2.5,2.5) 0,2.5 0,38 cw(c2,38) 2,40 37.5,40 cw(c37.5,37.5) 40,37.5 40,2 cw(c38,2) 38,0

## Keep-outs
Keep-Out Layer:
  the board outline again, w0.1

## Other copper
Top Layer:
  region net +5V: 5.36,7.94 7.16,7.94 10.1,5 16,5 17.1,3.9 17.1,1.9 16.4,1.2 12.7,1.2 12.1,1.8 12.1,3.4 11.5,4 6,4 5.4,4.6
  region: 5.36,7.94
  region net NetC11_2: 12.9,12.9 12.7,12.7 12.7,12.05 13.5,11.25 15.48,11.25 15.48,12.5 15.4,12.5 15,12.5 15,12.9
  region: 15,13

## Silkscreen, mask and mechanical layers (free items; w line width, h text height)
Top Overlay:
  lines w0.2: 12.65,21.35 12.65,29.9 ; 19.85,21.6 22.35,24.1 ; 19.85,32.9 22.35,30.4 ; 28.65,24.1 31.15,21.6 ; 28.65,30.4 31.15,32.9
  text "X" at 12.05,33.9 h8 r270
  text "enon" at 13.35,30.75 h5 r270
  text "U" at 6.95,22.3 h3 r270
Bottom Overlay:
  text "D6" at 33.4,36.65 h0.9 r270
  text "F5" at 8.2,34.15 h0.9 r270
  text "F4" at 10.75,34.15 h0.9 r270
  text "F3" at 13.3,34.15 h0.9 r270
  text "F2" at 15.85,34.15 h0.9 r270
  text "E2" at 20.95,34.15 h0.9 r270
  text "E1" at 23.5,34.15 h0.9 r270
  text "E0" at 26.05,34.15 h0.9 r270
  text "D7" at 28.6,34.15 h0.9 r270
  text "C7" at 35.6,30.75 h0.9
  text "E3" at 18.65,30.4 h0.9 r270
  text "C6" at 35.6,28.211 h0.9
  text "C5" at 35.6,25.672 h0.9
  text "C4" at 35.6,23.133 h0.9
  text "C3" at 35.6,20.594 h0.9
  text "C2" at 35.6,18.056 h0.9
  text "D0" at 30.8,17.3 h0.9
  text "B5" at 35.6,15.517 h0.9
  text "D1" at 30.8,14.713 h0.9
  text "19.08.2019" at 10,13 h1 r270
  text "B4" at 35.6,12.978 h0.9
  text "Tor Brodtkorb" at 11.6,12.95 h1.2 r270
  text "D2" at 30.8,12.125 h0.9
  text "B3" at 35.6,10.439 h0.9
  text "D3" at 30.8,9.537 h0.9
  text "B2" at 35.6,7.9 h0.9
  text "D4" at 30.8,6.95 h0.9
  text "GND" at 7.65,4.35 h0.9 r270
  text "GND" at 10.211,4.35 h0.9 r270
  text "+5V" at 12.772,4.35 h0.9 r270
  text "+5V" at 15.333,4.35 h0.9 r270
  text "A4" at 17.894,4.35 h0.9 r270
  text "A5" at 20.456,4.35 h0.9 r270
  text "A6" at 23.017,4.35 h0.9 r270
  text "A7" at 25.578,4.35 h0.9 r270
  text "C0" at 28.139,4.35 h0.9 r270
  text "C1" at 30.7,4.35 h0.9 r270